# Altium PCB SM_ME0005V2.6_20161210.PcbDoc (part 1 of 2)
Units mm, origin at the board's own origin, x right, y up, seen from the top; angles counter-clockwise.
Board outline 58.04 x 88.14 mm, 2 copper layers (Top Layer, Bottom Layer); 87 components, 70 nets, 269 pads, 297 vias.
Unrouted connection lines stored in the file: 30.
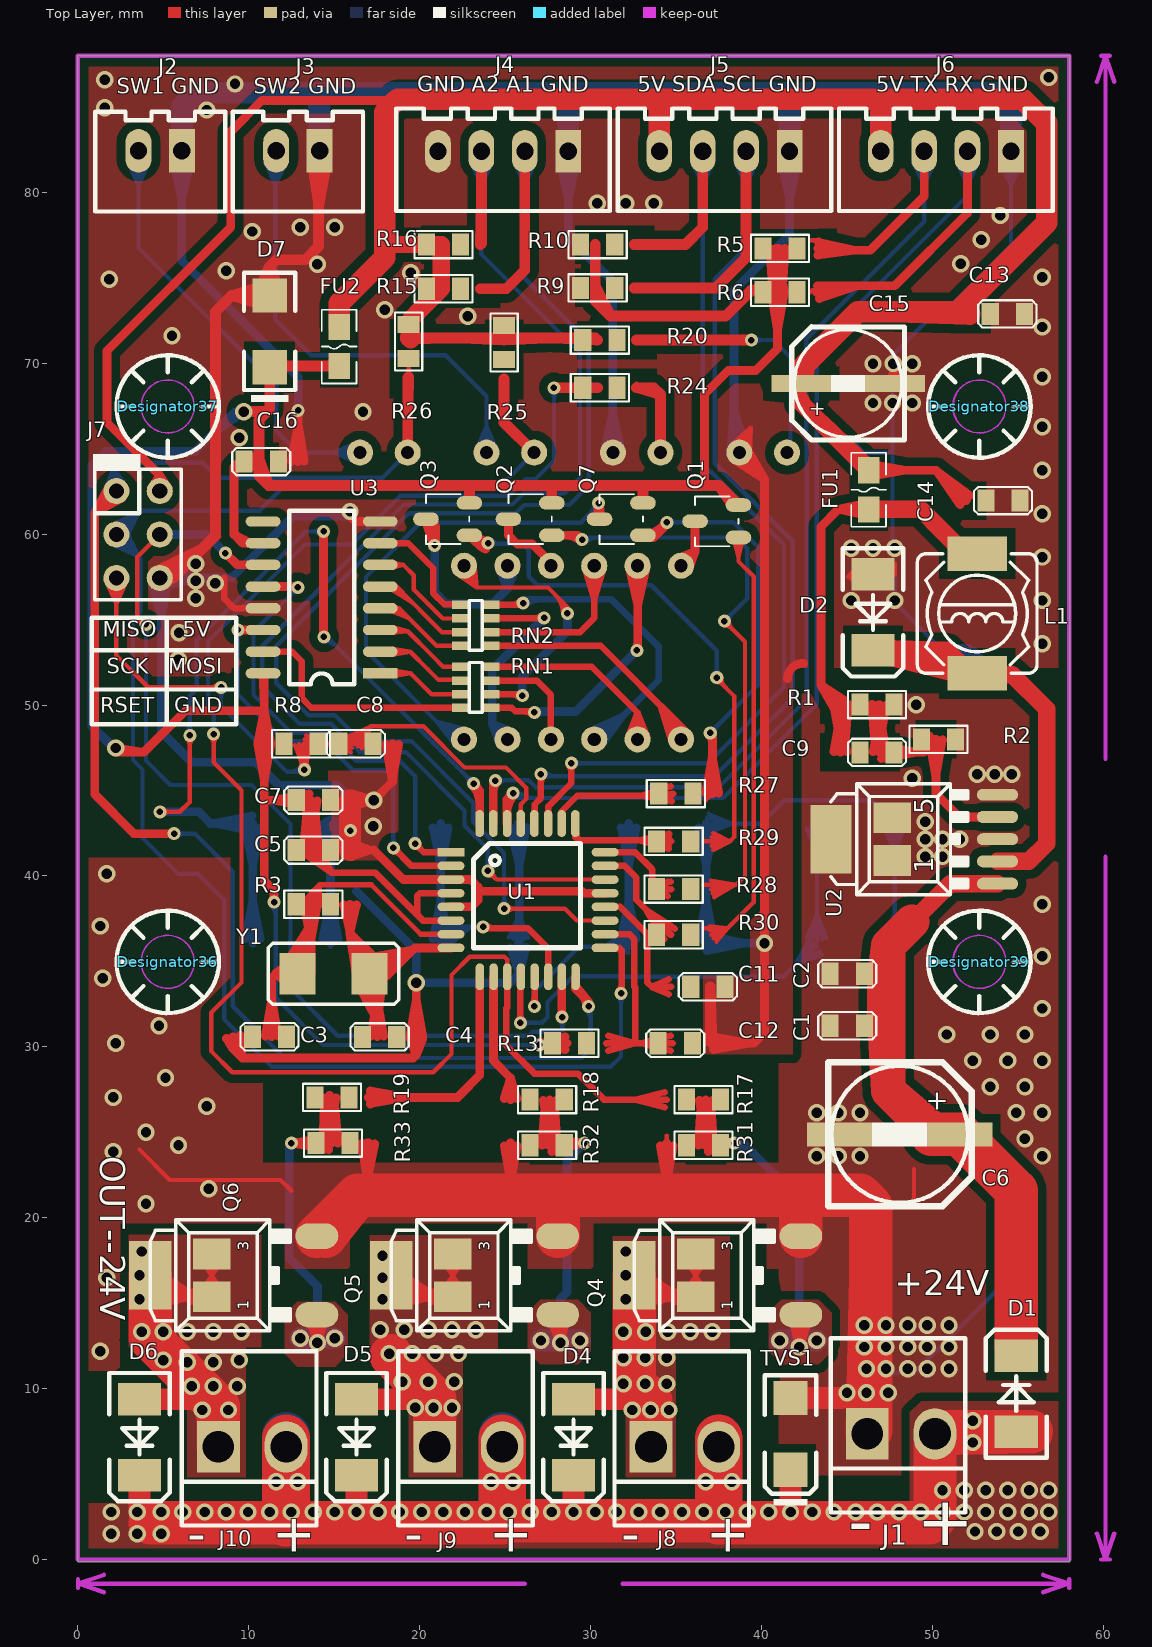
[diagram p0: Top Layer view]
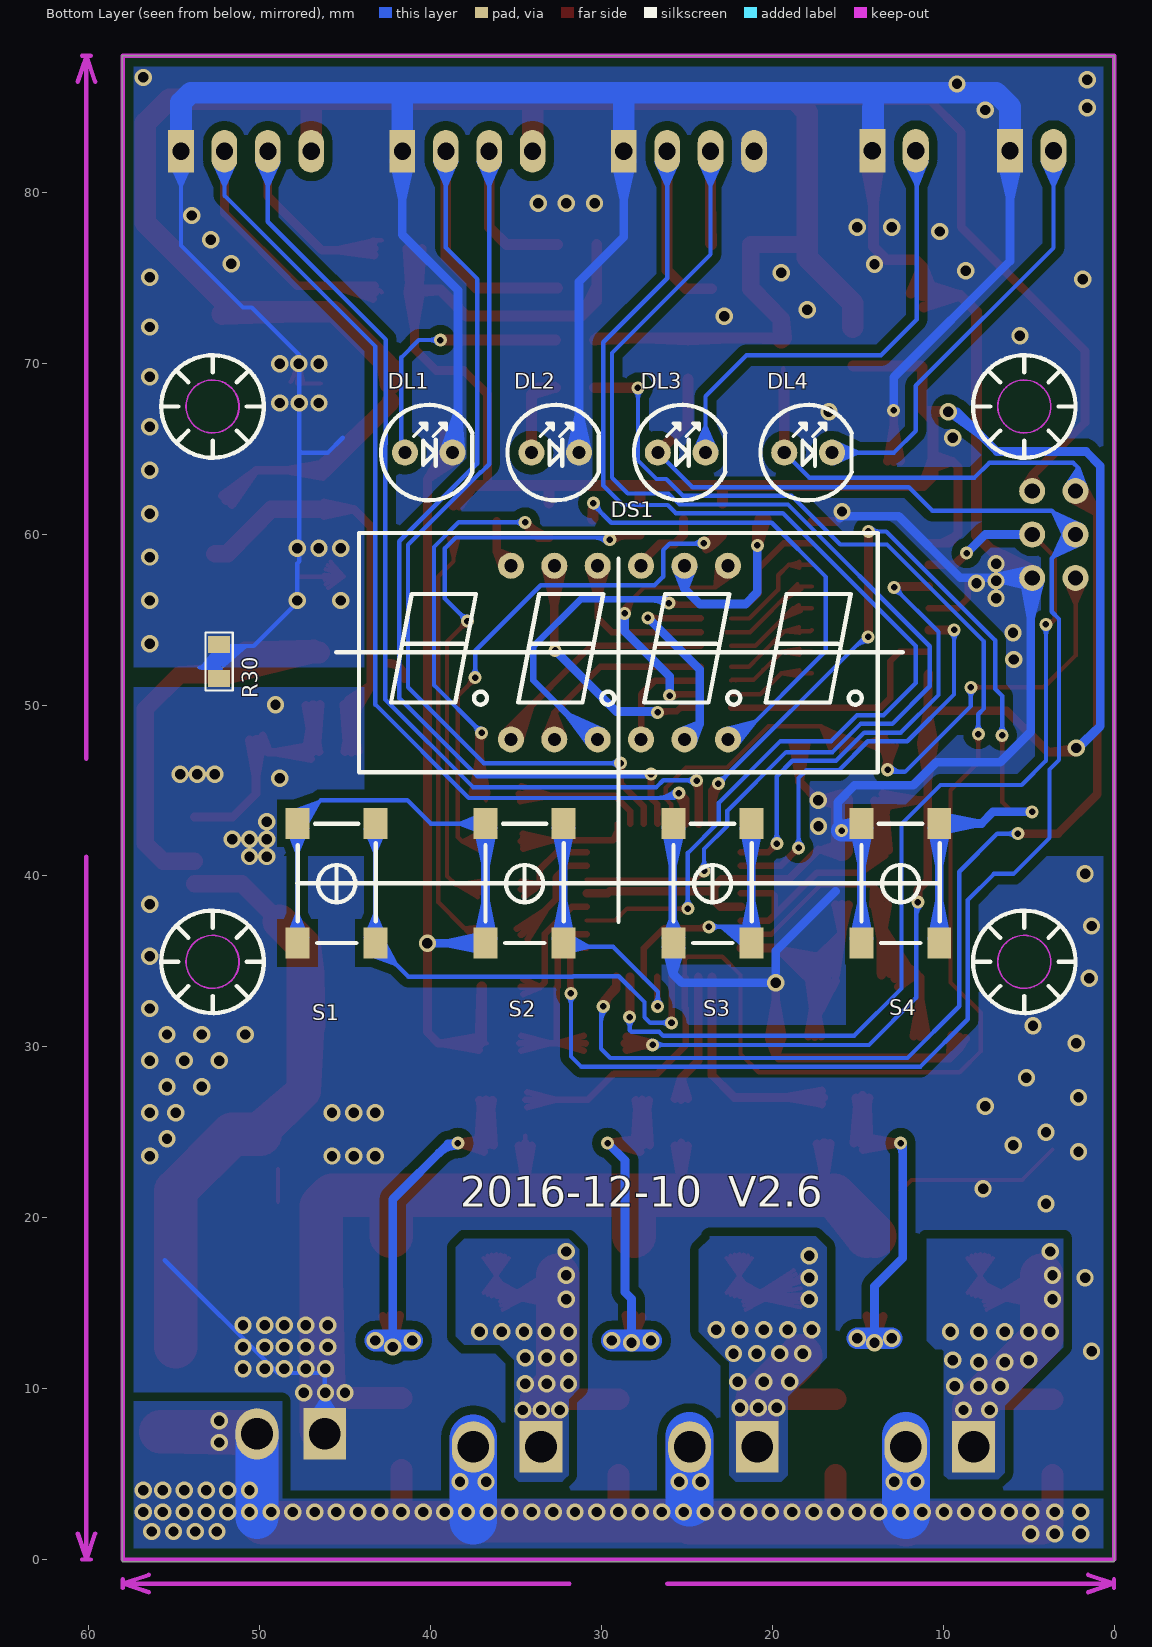
[diagram p1: Bottom Layer view, seen from below]

## Layer stack, top to bottom
Top Layer: signal copper 0.0356
Dielectric: core 0.32, FR-4, Dk 4.8
Bottom Layer: signal copper 0.0356

## Board outline
-0.013,88 -0.013,-0.138 58.026,-0.138 58.026,88

## Design rules (kind name [scope] priority, off if disabled: settings)
AssemblyTestPointUsage [All] p1 off:
AssemblyTestpoint [All] p1 off: testpointundercomponent=TRUE minsize=1.016 maxsize=2.54 preferedsize=1.524 minholesize=0 maxholesize=1.016 preferedholesize=0.813 testpointgrid=0.025 usegrid=TRUE gridtolerance=0 allowsidetop=TRUE allowsidebottom=TRUE
Clearance [All] p1: gap=0.254
ComponentClearance [All] p1 off: gap=0.254 collisioncheckmode=3 verticalgap=0.254 showdistances=FALSE
FabricationTestPointUsage TestPointUsage [All] p1 off: valid=0 allowmultiple=FALSE
FabricationTestpoint Testpoint [All] p1 off: side=3 testpointundercomponent=TRUE minsize=1.016 maxsize=2.54 preferedsize=1.524 minholesize=0 maxholesize=1.016 preferedholesize=0.813 testpointgrid=0.025 allowsidetop=TRUE allowsidebottom=TRUE usegrid=TRUE gridtolerance=0
Height [All] p1 off: minheight=0 maxheight=25.4 prefheight=12.7
HoleSize [All] p1 off: absolutevalues=TRUE maxlimit=2.54 minlimit=0.025 maxpercent=80.000 minpercent=20.000
HoleToHoleClearance [All] p1 off: gap=0.254 allowstackedmicrovias=TRUE
LayerPairs [All] p1 off: enforce=TRUE
MinimumSolderMaskSliver [All] p1 off: minsoldermaskwidth=0.254
NetAntennae [All] p1 off: netantennaetolerance=0
PolygonConnect [All] p1: connectstyle=Direct reliefconductorwidth=0.762 reliefentries=4 polygonreliefangle="45 Angle"
RoutingVias [All] p1: holewidth=0.381 width=0.762 viastyle="Through Hole" minholewidth=0.254 minwidth=0.508 maxholewidth=0.762 maxwidth=1.27
SilkToSilkClearance [All] p1 off: silktosilkclearance=0.254
SilkscreenOverComponentPads [IsPad] p1 off: minsilkscreentomaskgap=0.254
SolderMaskExpansion [isvia] p1: expansion=-2.54
Width [All] p1: maxlimit=7.62 minlimit=0.254 preferedwidth=0.508 minimp=50.000000 maximp=50.000000 favimp=50.000000
15 further rules are at their usual default settings.

## Components (designator, comment, footprint, x,y, rotation, side; value= is the part's Value field where it differs from the comment)
C1 "100pF" 0805C 46.018,31.231 r180 top
C2 "100pF" 0805C 46.018,34.279 r180 top
C3 "22pF" 0805C 10.204,30.596 r0 top
C4 "22pF" 0805C 18.656,30.584 r180 top
C5 "0.1uF" 0805C 14.776,41.518 r180 top
C6 "100UF/63V_E" SMD-EC-F8 51.606,24.881 r180 top
C7 "0.1uF" 0805C 14.776,44.439 r180 top
C8 "100nF" 0805C 17.259,47.741 r180 top
C9 "33nF" 0805C 45.764,47.233 r0 top
C11 "100nF" 0805C 35.858,33.517 r0 top
C12 "100nF" 0805C 35.951,30.215 r180 top
C13 "0.1UF" 0805C 53.384,72.887 r0 top
C14 "100pF" 0805C 53.13,61.965 r0 top
C15 "100uF/16V" SMD-EC-F6.3 42.335,68.823 r0 top
C16 "10uF" 0805C 11.728,64.251 r180 top
D1 "1N4004" D7227 54.908,7.482 r90 top
D2 "SS34" D7227 46.526,57.647 r270 top
D4 "1N4004" D7227 29,9.387 r270 top
D5 "1N4004" D7227 16.3,9.387 r270 top
D6 "1N4004" D7227 3.6,9.387 r270 top
D7 "5.6V" LC-SMA(DO-214AC)_S4 11.22,71.871 r90 top
Designator36 "Comment" M3.1 5.25,34.975 r0 top locked
Designator37 "Comment" M3.1 5.25,67.475 r0 top locked
Designator38 "Comment" M3.1 52.75,67.475 r0 top locked
Designator39 "Comment" M3.1 52.75,34.975 r0 top locked
DL1 "红" LED-3 40.1,64.775 r180 bottom
DL2 "绿" LED-3 32.7,64.775 r180 bottom
DL3 "黄" LED-3 25.3,64.775 r180 bottom
DL4 "黄" LED-3 17.9,64.775 r180 bottom
DS1 "SR410561K" SR410361 28.943,53.075 r180 bottom
FU1 "500mA/6V" F0805 46.272,61.457 r90 top
FU2 "100mA/6V" F0805 15.284,72.125 r270 top
J1 "SIP2-2.54" CH3.96-2P 50.152,7.355 r0 top
J2 "SIP2-2.54" SIP-2L 4.813,82.437 r180 top
J3 "SIP2-2.54" SIP-2L 12.871,82.437 r180 top
J4 "A_INPUT" SIP-4L 28.689,82.412 r180 top
J5 "IIC" SIP-4L 41.643,82.412 r180 top
J6 "USRT" SIP-4L 54.597,82.412 r180 top
J7 "ISP下载口" DIP6-2.54 6.083,63.87 r270 top
J8 "OUT-A" CH3.96-2P 37.494,6.593 r0 top
J9 "OUT-B" CH3.96-2P 24.837,6.593 r0 top
J10 "OUT-C" CH3.96-2P 12.179,6.593 r0 top
L1 "100uH/1A" L-CD74 52.622,55.361 r270 top
Q1 "S8550" SOT-23_B 38.652,59.806 r90 top
Q2 "S8550" SOT-23_B 27.73,59.933 r90 top
Q3 "S8550" SOT-23_B 22.904,59.933 r90 top
Q4 "NCE4060K" TO-252-3S 36.055,16.626 r90 top
Q5 "NCE4060K" TO-252-3S 21.831,16.626 r90 top
Q6 "NCE4060K" TO-252-3S 7.734,16.626 r90 top
Q7 "S8550" SOT-23_B 33.064,59.933 r90 top
R1 "10K" 0805R 45.764,50.027 r0 top
R2 "3.3K" 0805R 51.352,47.995 r180 top
R3 "1MR" 0805R 14.776,38.343 r180 top
R5 "2K" 0805R 42.081,76.722 r180 top
R6 "2K" 0805R 42.081,74.157 r180 top
R8 "1K" 0805R 12.052,47.741 r0 top
R9 "2K" 0805R 31.413,74.411 r180 top
R10 "2K" 0805R 31.413,76.951 r180 top
R13 "10R" 0805R 29.762,30.215 r180 top
R15 "10K" 0805R 22.396,74.36 r180 top
R16 "10K" 0805R 22.396,76.951 r180 top
R17 "22R" 0805R 35.604,26.913 r0 top
R18 "22R" 0805R 26.46,26.913 r0 top
R19 "22R" 0805R 15.862,27.04 r180 top
R20 "2K" 0805R 31.54,71.363 r180 top
R24 "2K" 0805R 31.54,68.569 r180 top
R25 "2K" 0805R 24.936,70.22 r90 top
R26 "2K" 0805R 19.348,70.271 r90 top
R27 "1K" 0805R 35.985,44.82 r180 top
R28 "1K" 0805R 35.858,42.026 r180 top
R29 "1K" 0805R 35.858,39.232 r180 top
R30 "0R" 0805R 52.368,51.551 r90 bottom
R30 "1K" 0805R 35.858,36.565 r180 top
R31 "470K" 0805R 35.604,24.246 r0 top
R32 "470k" 0805R 26.46,24.246 r0 top
R33 "470k" 0805R 15.919,24.373 r180 top
RN1 "8P4R 0603" 8P4R_0603 22.396,52.237 r0 top
RN2 "8P4R 0603" 8P4R_0603 22.396,55.869 r0 top
S1 "SW-PB" BUTTON_SMT_6*6 45.5,39.575 r90 bottom
S2 "SW-PB" BUTTON_SMT_6*6 34.5,39.575 r90 bottom
S3 "SW-PB" BUTTON_SMT_6*6 23.5,39.575 r90 bottom
S4 "SW-PB" BUTTON_SMT_6*6 12.5,39.575 r90 bottom
TVS1 "SMBJ30CA" LC-SMA(DO-214AC)_S5 41.7,7.355 r90 top
U1 "ATMEGA328PA" TQFP32 20.815,43.931 r0 top
U2 "XL7015" TO-252-5L 48.812,42.153 r90 top
U3 "SN74HC595D" SO-16N 18.783,51.17 r180 top
Y1 "16MHz" SMT5032 14.954,34.279 r180 top

## Footprints (in the part's own frame and the unit in brackets; to place one, negate y for a bottom-side part, rotate by r counter-clockwise, add the part's x,y. Pads: shape width x height; smd on the part's side, far side on the other; paste and mask are expansions set on the pad)
8P4R_0603 [mm]
  rect 1.016x0.5 smd: 1(0,0) 2(1.778,0) 3(0,-0.8) 4(1.778,-0.8) 5(0,-1.6) 6(1.778,-1.6) 7(0,-2.4) 8(1.778,-2.4)
  silkscreen extent 0.51,-2.67 1.27,0.25
0805C [mm]
  rect 1x1.3 smd: 1(0,0) 2(2,0)
  silkscreen extent -0.7,-0.8 2.7,0.8
0805R [mm]
  rect 1x1.3 smd: 1(0,0) 2(2,0)
  silkscreen extent -0.7,-0.8 2.7,0.8
BUTTON_SMT_6*6 [mm]
  rect 1.8x1.4 smd paste+0: 1(-3.5,2.275) 1(3.5,2.275) 2(-3.5,-2.275) 2(3.5,-2.275)
  silkscreen extent -3.5,-2.3 3.48,2.28
CH3.96-2P [mm]
  rect 2.5x3 hole 1.85: 1(-3.96,0)
  oval 2.5x3 hole 1.85: 2(0,0)
  silkscreen extent -6.1,-4.6 1.78,5.59, body extent -5.94,-3.91 1.92,4.59, height 10.9
D7227 [mm]
  rect 1.905x2.54 smd: A(0,0) K(4.445,0)
  silkscreen extent -1.52,-1.78 5.97,1.78, body extent -0.56,-1.45 4.93,1.35, height 2.24
DIP6-2.54 [mil]
  round 60 hole 35: 1(53,-151) 2(53,-51) 3(153,-151) 4(153,-51) 5(253,-151) 6(253,-51)
  silkscreen extent -33,-205 303,-1, body extent 3,-200 303,0, height 398
F0805 [mil]
  rect 60x50 smd: 1(0,0) 2(90,0)
  silkscreen extent -40,-40 130,40, body extent 4,-23 82,24, height 20
L-CD74 [mm]
  rect 2x3.5 smd mask+0.1: 1(3.5,0) 2(-3.5,0)
  silkscreen extent -3.5,-3.5 3.5,3.5
LC-SMA(DO-214AC)_S4 [mm]
  rect 2x2 smd: 1(2.1,0) 2(-2.1,0)
  silkscreen extent -4.12,-1.5 3.43,1.5
LC-SMA(DO-214AC)_S5 [mm]
  rect 2x2 smd: 1(2.1,0) 2(-2.1,0)
  silkscreen extent -4.2,-1.5 3.43,1.5
LED-3 [mil]
  round 60 hole 30: A(-55,0) K(55,0)
  silkscreen extent -110,-110 101,110
M3.1 [mm]
  Keep-Out Layer circle w0.1: c0,0 r1.55
  silkscreen extent -3,-3 3,3
SIP-2L [mil]
  rect 60x100 hole 40: 1(-50,0)
  oval 60x100 hole 40: 2(50,0)
  silkscreen extent -150,-90 150,140
SIP-4L [mm]
  rect 1.5x2.5 hole 1: 1(0,0)
  oval 1.5x2.5 hole 1: 2(2.54,0) 3(5.08,0) 4(7.62,0)
  silkscreen extent -2.44,-2.5 10.06,3.5, body extent -2.47,-2.52 9.93,3.58, height 7
SMD-EC-F6.3 [mm]
  rect 3.5x1 smd: 1(0,0) 2(5.475,0)
  silkscreen extent -0.56,-3.31 6.04,3.31
SMD-EC-F8 [mm]
  rect 3.8x1.4 smd: 1(0,0) 2(7.051,0)
  silkscreen extent -0.69,-4.22 7.71,4.2
SMT5032 [mm]
  rect 2.1x2.4 smd: 1(-2.1,0) 2(2.1,0)
  silkscreen extent -3.81,-1.78 3.81,1.78
SO-16N [mil]
  rect 80x24 smd: 1(43,-27)
  oval 80x24 smd: 2(43,-77) 3(43,-127) 4(43,-177) 5(43,-227) 6(43,-277) 7(43,-327) 8(43,-377) 9(313,-377) 10(313,-327) 11(313,-277) 12(313,-227) 13(313,-177) 14(313,-127) 15(313,-77) 16(313,-27)
  silkscreen extent 103,-402 253,-2, body extent 62,-403 300,3, height 84
SOT-23_B [mm]
  oval 0.8x1.5 smd: 1(0,0) 2(1.9,0) 3(0.95,2.54)
  silkscreen extent -0.51,0 2.4,2.54, body extent -0.48,-0.13 2.42,2.67, height 1.2
SR410361 [mil]
  round 60 hole 30: a(-150,200) b(250,200) c(50,-200) com1(-250,200) com2(50,200) com3(150,200) com4(250,-200) d(-150,-200) dp(-50,-200) e(-250,-200) f(-50,200) g(150,-200)
  silkscreen extent -600,-276 595,276, body extent -591,-275 591,276, height 287
TO-252-3S [mm]
  oval 1.5x2.5 smd: 1(-2.3,-6.25) 3(2.3,-6.25)
  rect 1.8x2.2 smd: 2(-1.25,-0.1) 2(1.25,-0.1)
  rect 4x2.5 smd: 2(0,3.5)
  silkscreen extent -3.25,-4.7 3.25,3.5
TO-252-5L [mm]
  oval 0.7x2.413 smd: 1(-2.6,-5) 2(-1.3,-5) 3(0,-5) 4(1.3,-5) 5(2.6,-5)
  rect 1.8x2.2 smd: 3(-1.25,1.15) 3(1.25,1.15)
  rect 4x2.413 smd: 3(0,4.75)
  silkscreen extent -3.25,-3.25 3.25,4.75
TQFP32 [mil]
  rect 62x19.68 smd: 1(40,-100)
  oval 62x19.68 smd: 2(40,-131.5) 3(40,-162.99) 4(40,-194.49) 5(40,-225.98) 6(40,-257.48) 7(40,-288.98) 8(40,-320.47) 17(395,-320.47) 18(395,-288.98) 19(395,-257.48) 20(395,-225.98) 21(395,-194.49) 22(395,-162.99) 23(395,-131.5) 24(395,-100)
  oval 19.68x62 smd: 9(106.51,-387) 10(138.01,-387) 11(169.5,-387) 12(201,-387) 13(232.5,-387) 14(263.99,-387) 15(295.49,-387) 16(326.98,-387) 25(326.52,-33.95) 26(295.02,-33.95) 27(263.53,-33.95) 28(232.03,-33.95) 29(200.54,-33.95) 30(169.04,-33.95) 31(137.54,-33.95) 32(106.05,-33.95)
  silkscreen extent 92,-320 338,-80, body extent 39,-388 393,-34, height 63

## Part data
C3 C4 C5 C7 C8 C11 C12 C16: library part CAP, "Capa"
C6 C15: library part 22UF/35V_E
D1 D4 D5 D6: library part Diode_2, "Default Diode"
D2: library part DIODE, "DIODE"
D7 TVS1: library part DIODE2, "DIODE2"
FU1 FU2: library part FUSE2, "Fuse"
J1 J2 J3: "CN"
J4 J5 J6: library part SIP4-2.54, "CN"
J8 J9 J10: library part CON2, "Connector"
L1: library part INDUCTOR
Q1 Q2 Q3 Q7: library part PNP, "PNP Transistor"
Q4 Q5 Q6: "NMOSFET"
R3 R5 R6 R8 R9 R10 R13: library part Res3, "Res"
U3: "8-Bit Shift Register with"
Y1: library part XTAL, "Crystal Oscil"

## Via types
v1: diameter 1.016, hole 0.61, Top Layer to Bottom Layer, 247 vias
v2: diameter 0.762, hole 0.381, Top Layer to Bottom Layer, 50 vias

## Nets (pads, with @x,y where several pads share a name; then routed paths per layer and width w, separated by ;. In a path a pad name is that pad's centre, name@x,y a point inside that pad or via, vN(x,y) a via of type N, cw(c..) or ccw(c..) an arc to the next point about the centre after c; other vN are vias at no path point)
+5V: C13.1 C14.1 C15.1 FU1.2 FU2.1 J5.4 J6.4 J7.2 R15.2 R16.2 R20.2 R25.2 R26.2 | length 222.6
  Top Layer w0.254: 19.348,71.49 19.475,71.363 ; 34.023,85.263 46.158,85.263 46.977,84.444
  Top Layer w0.508: 18.637,85.384 10.763,85.384 8.934,83.555 8.934,77.967 1.695,70.728 1.695,66.537 4.788,63.444 ; 42.335,69.331 C15.1@42.335,68.823 ; 43.097,67.045 42.335,67.807 ; FU1.2@46.272,63.743 50.209,63.743 51.987,61.965 ; FU1.2@46.306,63.363 48.431,63.743 FU1.2@46.306,64.122 ; 51.629,61.724 50.274,63.678 ; 51.923,61.965 50.274,63.678 ; 52.176,62.25 50.274,63.678 ; 4.788,63.444 J7.2@4.788,62.524 4.788,63.444 ; 4.788,63.444 4.299,62.664 4.788,63.444 ; 4.788,63.444 5.276,62.664 4.788,63.444 ; 42.335,67.807 C15.1@42.335,68.823 ; 42.335,67.807 C15.1@42.335,68.823
  Top Layer w0.635: 19.348,71.414 21.893,71.49 ; 19.348,71.49 19.475,71.49 30.27,71.49 30.397,71.363 ; 22.386,71.49 24.936,71.363 27.486,71.49 ; 27.781,71.49 30.333,71.363
  Top Layer w1.016: 19.475,71.363 19.475,71.49 R26.2@19.475,72.582 ; 21.189,74.36 R26.2@19.475,72.582 ; 21.189,76.951 17.951,76.951 21.253,76.951 ; 42.335,67.807 42.335,67.68 FU1.2@46.272,63.743 ; 43.482,66.533 FU1.2@46.272,63.87 ; R26.2@19.475,72.582 21.253,74.36 ; R26.2@19.475,72.582 19.348,71.477 R26.2@19.475,72.582 ; 21.253,74.36 21.253,76.951 ; 21.253,74.36 21.253,76.951
  Top Layer w1.27: FU2.1@15.284,72.125 15.284,73.522 ; J5.4@34.023,82.412 34.023,85.079 J5.4@34.023,82.912 ; C15.1@42.335,68.823 42.525,69.902 45.637,73.014 51.479,73.014 ; 42.335,69.331 42.335,69.712 ; J6.4@46.977,82.412 46.977,84.444 ; J6.4@46.977,82.912 46.977,84.444 ; 47.723,73.014 52.177,72.887 ; 15.284,73.522 17.951,76.189 17.951,76.951 17.951,84.698 18.637,85.384 18.713,85.46 21.907,85.46 47.288,85.46 ; 15.284,73.522 15.284,72.252 15.284,73.522 ; 46.977,84.444 46.977,85.149 47.288,85.46 ; 47.288,85.46 55.289,85.46 56.686,84.063 56.686,78.221 51.479,73.014 ; 51.479,73.014 52.177,72.887 ; 51.479,73.014 52.177,72.887
+24V: D1.A D4.K D5.K D6.K J1.2 J8.2 J9.2 J10.2 TVS1.2 | length 348.4
  Top Layer w0.254: D4.K@28.689,4.942 D4.K@29,4.942 D4.K@29.127,4.815 ; D1.A@54.343,7.355 54.908,6.79 54.562,7.136 D1.A@54.343,7.355
  Top Layer w0.508: 29,2.275 v1(29,2.783)
  Top Layer w0.635: 12.179,1.71 12.179,2.148 ; D4.K@29,4.942 D4.K@29.127,4.815 ; 37.367,2.275 37.494,2.148 37.494,1.782
  Top Layer w1.27: D6.K@3.6,4.942 v1@3.6,2.783 ; v1(16.3,2.783) D5.K@16.3,4.942 ; v1(29,2.783) D4.K@29,4.942 ; v1@3.6,2.783 4.235,2.148 v1@3.6,2.783 ; v1@41.7,2.529 41.954,2.275 ; v1@41.7,2.529 TVS1.2@41.7,5.255 v1@41.7,2.529 ; 41.954,2.275 41.827,2.148 41.954,2.275
  Top Layer w2.54: 18.84,2.148 12.179,2.148 ; v1@24.837,2.529 25.091,2.275 ; 12.179,2.148 23.031,2.148 ; 12.179,2.148 4.235,2.148 5.251,2.148 6.775,2.148 8.299,2.148 9.95,2.148 11.728,2.148 12.179,2.148 ; 12.179,2.148 13.379,2.148 15.157,2.148 16.808,2.148 18.459,2.148 20.11,2.148 21.634,2.148 23.031,2.148 ; 23.031,2.148 24.837,2.148 24.428,2.148 23.031,2.148 ; 25.091,2.275 37.367,2.275 36.62,2.275 35.223,2.275 33.699,2.275 32.302,2.275 30.778,2.275 29.254,2.275 29,2.275 27.476,2.275 25.952,2.275 25.091,2.275 ; 41.827,2.148 49.828,2.148 ; 41.827,2.148 37.494,2.148 38.017,2.148 39.541,2.148 40.938,2.148 41.827,2.148 ; 41.827,2.148 42.462,2.148 44.113,2.148 45.51,2.148 47.034,2.148 48.431,2.148 49.32,2.148 49.828,2.148 ; 49.828,2.148 50.152,2.472 ; 50.152,2.472 J1.2@50.152,7.355 ; 50.152,2.472 50.152,3.418 50.152,3.545 ; 50.152,2.472 J1.2@50.152,7.105 ; 50.152,3.545 50.152,5.069 ; 50.152,3.545 J1.2@50.152,7.105 ; 50.152,5.069 50.152,5.577 ; 50.152,5.069 J1.2@50.152,7.105 ; 50.152,5.069 J1.2@50.152,7.105 ; 50.152,5.577 J1.2@50.152,7.355 ; 50.152,5.577 J1.2@50.152,7.105 ; 50.152,5.577 J1.2@50.152,7.105 ; J1.2@50.152,7.355 J1.2@50.279,7.482 ; J1.2@50.152,7.355 52.368,7.482 ; J1.2@50.152,7.355 52.241,7.482 ; J1.2@50.152,7.355 52.241,7.482 ; J1.2@50.152,7.355 55.797,7.482 J1.2@50.279,7.482 ; J1.2@50.152,7.355 D1.A@54.908,7.482 52.368,7.482 ; J1.2@50.152,7.355 52.368,7.482 ; J1.2@50.152,7.355 D1.A@54.59,7.482 ; J1.2@50.152,7.355 52.368,7.482 ; J1.2@50.152,7.355 D1.A@54.59,7.482 ; J1.2@50.152,7.355 52.241,7.482 ; J1.2@50.152,7.355 D1.A@54.59,7.482 ; J1.2@50.152,7.355 D1.A@54.59,7.482 ; J1.2@50.152,7.355 52.368,7.482 ; J1.2@50.279,7.482 52.241,7.482 ; J1.2@50.279,7.482 D1.A@54.59,7.482 ; 52.241,7.482 52.368,7.482 ; 52.241,7.482 D1.A@54.59,7.482 ; 52.368,7.482 D1.A@54.59,7.482 ; 52.368,7.482 D1.A@54.59,7.482
  Top Layer w2.794: J10.2@12.179,6.593 12.179,4.561 ; J10.2@12.179,7.101 12.179,2.148 ; J9.2@24.837,7.101 J9.2@24.837,6.593 ; J8.2@37.494,6.593 37.494,4.561 ; J8.2@37.494,7.101 v1@37.494,2.783 ; 12.179,2.148 12.179,4.561 ; 12.179,2.148 J10.2@12.179,6.343 ; 12.179,2.148 J10.2@12.179,6.343 ; 12.179,4.561 J10.2@12.179,6.343 ; 12.179,4.561 J10.2@12.179,6.343 ; v1@24.837,2.529 J9.2@24.837,6.593 ; v1@24.837,2.529 24.837,4.561 ; v1@24.837,2.529 J9.2@24.837,6.343 ; v1@24.837,2.529 J9.2@24.837,6.343 ; 24.837,4.561 J9.2@24.837,6.593 ; 24.837,4.561 J9.2@24.837,6.343 ; 24.837,4.561 J9.2@24.837,6.343 ; v1@37.494,2.783 37.494,4.561 ; v1@37.494,2.783 J8.2@37.494,6.343 ; v1@37.494,2.783 J8.2@37.494,6.343 ; 37.494,4.561 J8.2@37.494,6.343 ; 37.494,4.561 J8.2@37.494,6.343
  Bottom Layer w2.54: 50.152,2.459 J1.2@50.152,7.355 50.152,5.577 ; 50.152,2.459 50.152,3.418 50.152,3.545 ; 50.152,2.459 J1.2@50.152,7.105 ; 50.152,3.545 50.152,5.069 ; 50.152,3.545 J1.2@50.152,7.105 ; 50.152,5.069 50.152,5.577 ; 50.152,5.069 J1.2@50.152,7.105 ; 50.152,5.069 J1.2@50.152,7.105 ; 50.152,5.577 J1.2@50.152,7.105 ; 50.152,5.577 J1.2@50.152,7.105
  Bottom Layer w2.794: J10.2@12.179,6.593 12.179,4.561 ; J10.2@12.179,7.228 v1@12.179,2.586 ; J9.2@24.837,6.593 24.837,4.561 ; J9.2@24.837,7.228 24.837,3.319 ; J8.2@37.494,6.593 37.494,4.561 ; J8.2@37.494,7.101 37.494,2.275 ; v1@12.179,2.586 12.179,4.561 ; v1@12.179,2.586 J10.2@12.179,6.343 ; v1@12.179,2.586 J10.2@12.179,6.343 ; 12.179,4.561 J10.2@12.179,6.343 ; 12.179,4.561 J10.2@12.179,6.343 ; 24.837,3.319 24.837,4.561 ; 24.837,3.319 J9.2@24.837,6.343 ; 24.837,3.319 J9.2@24.837,6.343 ; 24.837,4.561 J9.2@24.837,6.343 ; 24.837,4.561 J9.2@24.837,6.343 ; 37.494,2.275 37.494,4.561 ; 37.494,2.275 J8.2@37.494,6.343 ; 37.494,2.275 J8.2@37.494,6.343 ; 37.494,4.561 J8.2@37.494,6.343 ; 37.494,4.561 J8.2@37.494,6.343
  other v1: 1.949,1.513 3.473,1.513 4.87,1.513 52.495,1.64 53.765,1.64 55.035,1.64 56.305,1.64 1.949,2.783 3.473,2.783 4.87,2.783 6.14,2.783 7.41,2.783 8.68,2.783 9.95,2.783 11.22,2.783 12.49,2.783 13.76,2.783 15.03,2.783 17.57,2.783 18.84,2.783 20.11,2.783 21.38,2.783 22.65,2.783 23.92,2.783 25.19,2.783 26.46,2.783 27.73,2.783 30.27,2.783 31.54,2.783 32.81,2.783 34.08,2.783 35.35,2.783 36.62,2.783 37.89,2.783 39.16,2.783 40.43,2.783 41.7,2.783 42.97,2.783 44.24,2.783 45.51,2.783 46.78,2.783 48.05,2.783 49.32,2.783 50.59,2.783 51.86,2.783 53.13,2.783 54.4,2.783 55.67,2.783 56.813,2.783 50.59,4.053 51.86,4.053 53.13,4.053 54.4,4.053 55.67,4.053 56.813,4.053 11.601,4.561 12.871,4.561 24.174,4.561 25.444,4.561 36.747,4.561 38.271,4.561 52.368,6.847 52.368,8.117
A1: J4.2 R15.1 U1.19 | length 95.2
  Top Layer w0.254: v2(24.936,38.089) 28.492,38.089 29.19,37.391 U1.19@30.848,37.391 ; v2@25.116,37.909 cw(c25.549,37.476) 25.549,38.089 cw(c25.549,38.702) v2@25.116,38.269 ; 29.299,37.391 U1.19@30.311,37.391
  Top Layer w0.635: 23.539,74.36 25.063,74.36 ; 23.602,74.36 25.063,74.36 ; J4.2@26.149,82.412 26.149,75.446 25.063,74.36
  Bottom Layer w0.254: v2@24.756,38.269 ccw(c24.323,38.702) 24.936,38.702 ccw(c25.549,38.702) v2@25.116,38.269 ; v2(24.936,38.089) 24.936,41.137 ; 24.936,41.34 24.936,41.137 ; J4.2@25.539,81.784 26.149,80.4 ; J4.2@25.783,81.867 26.149,80.4 ; J4.2@26.149,81.912 26.149,80.4 ; J4.2@26.149,82.412 26.149,74.976 29.889,71.236 29.889,62.854 28.746,61.711 26.119,61.711 25.642,61.234 19.379,61.234 17.824,59.679 11.601,53.456 11.601,51.297 13.491,49.407 15.037,49.407 16.551,47.893 19.515,47.893 23.133,44.276 23.133,43.156 24.936,41.352 24.936,41.137 ; J4.2@26.515,81.867 26.149,80.4 ; J4.2@26.759,81.784 26.149,80.4
A2: J4.3 R16.1 U1.22 | length 91.1
  Top Layer w0.254: v2@23.99,40.045 cw(c23.99,39.432) 24.424,39.865 cw(c24.857,40.299) v2@24.244,40.299 ; v2(23.99,40.299) 24.498,39.791 U1.22@30.848,39.791 ; 29.299,39.791 U1.22@30.311,39.791
  Top Layer w0.635: 23.609,79.494 23.539,76.951 23.609,77.021 J4.3@23.609,82.412
  Bottom Layer w0.254: J4.3@22.999,81.784 23.609,80.4 ; J4.3@23.243,81.867 23.609,80.4 ; J4.3@23.609,81.912 23.609,80.4 ; J4.3@23.609,82.412 23.609,76.373 29.381,70.601 29.381,63.302 28.458,62.38 26.069,62.38 25.431,61.742 19.081,61.742 10.782,53.443 10.782,51.1 12.983,48.899 14.827,48.899 16.476,47.25 19.189,47.25 22.625,43.814 22.625,42.94 23.99,41.575 v2(23.99,40.299) ; v2@23.81,40.478 ccw(c23.377,40.912) 23.99,40.912 ccw(c24.603,40.912) v2@24.17,40.478 ; J4.3@23.975,81.867 23.609,80.4 ; J4.3@24.219,81.784 23.609,80.4
CTR_OUT1: R17.1 R24.2 U1.11 | length 108.6
  Top Layer w0.254: v2@7.764,48.12 cw(c7.33,47.687) 7.943,47.687 cw(c8.557,47.687) v2@8.123,48.12 ; v2(7.943,48.3) 7.943,46.649 9.569,45.023 9.569,33.771 7.918,32.12 7.791,31.993 7.791,29.752 9.029,28.513 20.79,28.513 21.856,29.58 21.856,34.203 22.923,35.27 24.961,35.27 25.12,35.111 ; U1.11@25.12,34.101 25.12,35.111 ; U1.11@25.12,34.639 25.12,35.111
  Top Layer w0.381: U1.11@25.069,34.05 U1.11@25.12,34.101 25.12,32.298 ; U1.11@25.12,33.564 25.12,32.298 ; 34.342,26.472 32.619,26.913 ; 34.342,27.354 32.619,26.913 ; 34.397,26.913 32.619,26.913 ; 34.461,26.913 30.778,26.913 29.254,28.437 26.714,28.437 25.069,30.081 25.069,32.247 25.12,32.298
  Top Layer w0.635: 30.333,68.569 v2(27.857,68.569) 30.397,68.569
  Bottom Layer w0.254: v2@7.764,48.479 ccw(c7.33,48.913) 7.943,48.913 ccw(c8.557,48.913) v2@8.123,48.479 ; v2(7.943,48.3) 7.943,49.468 7.613,49.798 7.613,53.727 13.286,59.4 16.021,59.4 18.871,62.25 25.221,62.25 26.206,63.235 26.773,63.235 27.857,64.318 v2(27.857,68.569) ; v2@27.677,68.389 cw(c27.244,67.956) 27.857,67.956 cw(c28.47,67.956) v2@28.037,68.389
CTR_OUT2: R18.1 U1.10 | length 11.9
  Top Layer w0.508: 24.32,31.79 U1.10@24.32,33.564 ; U1.10@24.32,34.101 24.32,29.18 25.317,28.183 ; 24.94,26.97 25.317,28.183 ; 25.317,26.913 25.317,28.183 ; 25.694,26.97 25.317,28.183
CTR_OUT3: R19.1 U1.9 | length 21.2
  Top Layer w0.254: 22.212,27.167 22.339,27.167
  Top Layer w0.508: 17.005,27.04 22.212,27.04 22.339,27.167 23.52,28.348 U1.9@23.52,34.101 ; 17.068,27.04 19.227,27.04 ; 17.102,26.66 19.227,27.04 ; 17.102,27.419 19.227,27.04 ; 23.52,31.79 U1.9@23.52,33.564
DIS_COM1: Q1.1 R30.1@35.858,36.565 | length 40.4
  Top Layer w0.254: Q1.1@38.381,59.774 38.652,58.644 ; Q1.1@38.923,59.774 38.652,58.644 ; 38.017,36.946 36.62,36.946 37.001,36.946 38.017,36.946 ; 38.017,36.946 39.541,38.47 39.541,57.52 38.652,58.409 Q1.1@38.652,59.806 38.652,58.644 ; 38.017,36.946 36.998,37.069 38.017,36.946 ; 38.017,36.946 37.364,36.155 38.017,36.946 ; 38.017,36.946 37,36.811 38.017,36.946 ; 38.017,36.946 37.187,36.343 38.017,36.946 ; 38.017,36.946 37.064,36.565 38.017,36.946
DIS_COM2: Q2.1 R29.1 | length 56.7
  Top Layer w0.254: 37.242,38.756 38.475,39.486 ; 37.242,38.756 38.47,39.486 ; v2@37.833,54.656 cw(c37.833,54.043) 38.267,54.476 cw(c38.7,54.91) v2@38.087,54.91 ; v2(37.833,54.91) 39.033,53.71 39.033,39.994 38.525,39.486 ; 38.47,39.486 37.064,39.74 38.475,39.486 ; 38.47,39.486 37.042,39.485 38.475,39.486 ; 38.47,39.486 37.132,38.987 38.475,39.486 ; 38.47,39.486 37.064,39.232 38.475,39.486 ; 38.525,39.486 36.62,39.486 37.001,39.486 38.525,39.486
  Top Layer w0.508: Q2.1@27.73,59.933 v2@29.254,59.933 ; Q2.1@28.08,59.933 v2@29.254,59.933 ; v2(29.508,59.679) v2@29.254,59.933 ; 28.588,59.933 cw(c28.588,58.759) 29.418,59.589 ccw(c28.588,58.759) 28.588,59.933
  Bottom Layer w0.254: v2(29.508,59.679) 29.635,59.806 38.525,59.806 39.16,59.171 39.16,56.237 v2(37.833,54.91) ; v2@29.688,59.499 cw(c30.428,58.759) 30.428,59.806 ; v2@37.833,55.164 ccw(c37.833,55.777) 38.267,55.344 ccw(c38.7,54.91) v2@38.087,54.91
DIS_COM3: Q3.1 R28.1 | length 46.6
  Top Layer w0.254: v2@23.742,59.476 v2(23.996,59.476) ; 36.62,42.026 37.001,42.026 38.144,42.026 ; 37.064,42.026 38.144,42.026 ; 37.094,41.774 38.144,42.026 ; 37.094,42.278 38.144,42.026 ; 37.184,41.532 38.144,42.026 ; 37.184,42.52 38.144,42.026 ; v2@37.357,51.576 v2(37.382,51.602) ; v2@37.382,51.348 cw(c37.382,50.857) 37.729,51.204 ; v2@37.509,51.424 38.398,50.535 38.398,42.28 38.144,42.026 ; v2@37.636,51.602 ccw(c38.372,51.602) 37.852,51.081
  Top Layer w0.508: Q3.1@23.348,59.845 ccw(c23.963,60.502) v2@23.992,59.603 ; v2@23.973,59.601 cw(c23.755,60.783) Q3.1@22.904,59.933 23.361,59.476 ; Q3.1@23.254,59.933 23.742,59.476 23.361,59.476 ; Q3.1@23.254,59.933 23.361,59.476 ; Q3.1@23.254,59.933 23.361,59.476 ; Q3.1@23.264,59.892 ccw(c24.423,60.164) 23.795,59.152 cw(c24.423,60.164) Q3.1@23.264,59.892 ; Q3.1@23.293,59.766 ccw(c24.182,59.974) 23.863,59.119 cw(c24.182,59.974) Q3.1@23.293,59.766
  Bottom Layer w0.254: v2(23.996,59.476) 24.022,59.45 26.003,59.45 26.384,59.069 26.384,57.52 26.892,57.012 33.547,57.012 37.382,53.177 v2(37.382,51.602) ; v2@24.176,59.296 cw(c24.548,58.924) 24.548,59.45 ; v2@24.176,59.655 ccw(c24.671,60.15) 24.671,59.45 ; v2@37.202,51.781 ccw(c36.769,52.215) 37.382,52.215 ccw(c37.995,52.215) v2@37.562,51.781
DIS_COM4: Q7.1 R27.1 | length 33.8
  Top Layer w0.254: 36.747,44.439 37.128,44.82 37.255,44.947
  Top Layer w0.508: Q7.1@33.414,59.933 v2@34.461,60.568 ; 34.031,60.307 ccw(c33.68,60.886) v2@34.338,60.725 ; 34.154,60.261 ccw(c33.721,60.695) v2@34.334,60.695 ; v2(34.461,60.695) v2@34.461,60.568 ; 36.748,44.854 37.128,46.979 37.508,44.854 ; v2@36.911,48.286 cw(c36.388,47.763) 37.128,47.763 ; v2(37.001,48.376) 37.128,48.249 37.128,44.82 ; Q7.1@33.699,59.806 33.064,59.806 Q7.1@33.699,59.806 ; Q7.1@33.699,59.806 v2@34.461,60.568
  Bottom Layer w0.254: v2(34.461,60.695) 38.354,60.695 39.795,59.254 39.795,51.17 v2(37.001,48.376) ; v2@34.641,60.515 cw(c35.074,60.082) 35.074,60.695 cw(c35.074,61.308) v2@34.641,60.875 ; v2@37.001,48.63 ccw(c37.001,49.243) 37.435,48.81 ccw(c37.868,48.376) v2@37.255,48.376
DS: U1.2 U3.14 | length 29.2
  Top Layer w0.254: v2(18.459,41.645) v2@18.586,41.645
  Top Layer w0.381: v2@18.459,41.454 cw(c18.459,40.995) 18.784,41.32 cw(c19.109,41.645) v2@18.649,41.645 ; v2(18.459,41.645) 19.513,40.591 U1.2@21.831,40.591 ; 19.901,40.591 U1.2@21.294,40.591
  Top Layer w0.508: U3.14@10.122,54.396 v2(9.36,54.396) U3.14@10.833,54.396
  Bottom Layer w0.254: v2@9.18,54.216 cw(c8.746,53.783) 9.36,53.783 cw(c9.973,53.783) v2@9.539,54.216 ; v2(9.36,54.396) 9.36,50.617 12.094,47.883 14.406,47.883 16.097,46.192 18.001,46.192 18.459,45.734 v2(18.459,41.645) ; v2@18.279,41.825 ccw(c17.846,42.258) 18.459,42.258 ccw(c19.072,42.258) v2@18.639,41.825
GND: C3.1 C4.1 C5.1 C7.1 C8.1 C11.2 C12.1 C13.2 C14.2 C15.2 C16.1 D2.A D7.1 DL1.K DL2.K J2.1 J3.1 J4.1 J4.4 J5.1 J6.1 J7.6 R30.2@52.368,53.551 S1.1 S2.1 S3.1 S4.1 U1.3 U1.5 U1.21 U3.8 U3.13 | length 708.2
  Top Layer w0.254: U3.13@10.757,55.742 U3.13@10.833,55.666 ; v2@12.636,67.248 v2@12.871,67.013 ; 29.508,39.105 29.622,38.991 ; 36.713,30.215 37.094,30.215 ; DL1.K@38.188,65.147 39.363,66.232 ; DL1.K@38.377,64.972 39.363,66.232 ; DL1.K@38.603,64.775 38.603,65.472 39.363,66.232 ; DL1.K@38.703,64.775 39.363,66.232 ; DL1.K@39.066,64.66 39.363,66.232 ; DL1.K@39.322,64.633 39.363,66.232 ; C15.2@46.418,68.823 C15.2@47.701,68.823 ; C15.2@47.438,68.846 v1@47.701,70.091 ; C15.2@47.438,68.848 v1(47.701,69.987) ; 47.701,70.506 C15.2@47.701,68.823 ; 47.796,58.282 47.796,57.647 D2.A@47.669,57.52 ; C15.2@48.171,68.917 v1(47.701,69.987) ; C15.2@48.173,68.909 v1@47.701,70.091 ; 45.072,57.52 D2.A@47.669,57.52 ; 45.072,57.52 D2.A@47.669,57.52 ; 45.072,57.52 45.998,56.849 45.072,57.52 ; 45.072,57.52 45.827,58.379 45.072,57.52 ; 45.072,57.52 46.128,57.081 45.072,57.52 ; 45.072,57.52 46.005,58.181 45.072,57.52 ; 45.072,57.52 46.2,57.33 45.072,57.52 ; 45.072,57.52 46.13,57.955 45.072,57.52 ; 45.072,57.52 46.208,57.647 45.072,57.52 ; C15.2@47.701,68.823 v1(47.701,69.987) ; v1(47.701,69.987) C15.2@47.81,68.823 v1@47.701,70.091
  Top Layer w0.381: 8.553,57.444 8.553,56.25 9.137,55.666 ; U3.13@10.122,55.666 9.137,55.666 ; U3.13@10.833,55.666 9.137,55.666 ; 15.919,41.518 17.316,41.518 ; 15.982,41.518 17.316,41.518 ; 16.057,41.08 17.316,41.518 ; 16.057,41.956 17.316,41.518
  Top Layer w0.508: 8.793,30.408 9.614,29.351 ; 9.124,30.596 9.614,29.351 ; 9.495,30.683 9.614,29.351 ; 12.492,64.288 12.89,66.41 ; v2(12.89,67.248) 12.89,64.27 12.871,64.251 12.89,66.41 ; 13.251,64.281 12.89,66.41 ; 15.919,41.518 16.046,41.391 ; 15.919,44.439 v1(17.316,44.439) ; 15.982,44.439 v1(17.316,44.439) ; 16.037,44.062 v1(17.316,44.439) ; 16.037,44.816 v1(17.316,44.439) ; v1@16.052,60.936 16.243,60.746 ; U3.8@16.98,60.746 16.243,60.746 ; 17.316,41.518 19.043,39.791 U1.3@21.831,39.791 22.98,39.791 ; U3.8@17.691,60.746 16.243,60.746 ; 18.022,47.707 18.402,45.582 18.782,47.707 ; 18.402,47.741 18.402,45.525 v1(17.316,44.439) ; 19.419,30.617 19.799,32.743 20.179,30.617 ; 19.424,30.515 19.799,29.523 ; 19.52,39.791 U1.3@21.294,39.791 ; v1(19.799,33.746) 19.799,30.584 19.799,29.523 ; 20.174,30.515 19.799,29.523 ; U1.5@21.831,38.191 23.031,38.191 ; U1.5@22.368,38.191 23.031,38.191 ; U1.3@22.368,39.791 22.98,39.791 ; 29.508,39.105 23.412,39.105 ; U1.21@30.311,38.991 29.622,38.991 U1.21@30.848,38.991 ; 37.094,30.215 39.541,30.215 40.176,30.85 v1(40.176,36.057) 40.176,63.202 ; 37.158,30.215 39.317,30.215 ; 37.191,29.835 39.317,30.215 ; 37.191,30.594 39.317,30.215 ; 41.522,51.551 cw(c42.437,51.526) 42.462,52.44 ; 9.061,29.904 9.614,29.351 ; 9.061,29.904 9.061,30.596 ; 9.061,29.904 9.427,30.491 9.061,29.904 ; 9.061,29.904 8.695,30.491 9.061,29.904 ; 9.061,29.904 9.061,30.596 ; 9.061,29.904 9.061,30.596 ; 9.614,29.351 19.627,29.351 19.799,29.523 ; 22.98,39.791 23.412,39.359 23.412,39.105 ; 23.031,38.191 23.412,38.572 23.412,39.105 ; 40.176,63.202 38.603,64.775 40.176,63.202 ; 40.176,63.202 39.112,65.076 40.176,63.202 ; 40.176,63.202 38.376,64.386 40.176,63.202 ; 40.176,63.202 DL1.K@38.703,64.775 40.176,63.202
  Top Layer w0.635: J7.6@4.563,57.828 7.252,59.14 ; J7.6@5.066,57.097 7.252,59.14 ; D7.1@10.551,74.107 11.22,75.681 ; D7.1@11.115,73.297 9.002,73.971 ; D7.1@11.115,74.645 9.002,73.971 ; D7.1@11.889,74.107 11.22,75.681 ; J3.1@13.697,81.902 14.084,79.262 ; J3.1@14.084,82.666 14.084,76.835 13.311,76.062 11.601,76.062 11.22,75.681 ; J3.1@14.141,81.929 14.084,79.262 ; J3.1@14.583,81.883 14.084,79.262 ; 37.066,30.976 37.001,33.517 ; J7.6@4.788,57.444 5.556,57.444 ; J7.6@4.788,57.444 7.252,59.14 ; J7.6@4.788,57.444 5.556,57.444 ; 5.556,57.444 8.045,59.933 8.045,73.014 9.002,73.971 ; 5.556,57.444 4.916,57.869 5.556,57.444 ; 5.556,57.444 4.916,57.018 5.556,57.444 ; 9.002,73.971 D7.1@11.22,73.971 ; 9.002,73.971 D7.1@11.22,73.971 ; D7.1@11.22,73.971 11.22,75.681 ; 37.001,33.517 37.001,30.308 37.094,30.215 37.001,32.76 37.001,33.517
  Top Layer w1.27: 15.919,41.518 15.919,44.439
  Bottom Layer w0.254: v2@12.636,67.248 v2@12.871,67.483 ; S4.1@14.776,35.854 S4.1@14.776,36.057 ; S3.1@25.217,36.406 25.825,37.738 ; S3.1@25.217,42.744 25.825,41.412 ; S3.1@25.459,36.321 25.825,37.738 ; S3.1@25.459,42.829 25.825,41.412 ; S3.1@25.775,36.275 25.825,37.738 ; S3.1@25.775,42.875 25.825,41.412 ; S3.1@25.825,36.125 25.825,35.803 S3.1@25.825,43.057 ; S3.1@26.093,36.299 25.825,37.738 ; S3.1@26.093,42.851 25.825,41.412 ; S3.1@26.34,36.368 25.825,37.738 ; S3.1@26.34,42.782 25.825,41.412 ; 28.619,85.841 28.689,85.771 28.689,85.587 ; 31.303,85.587 31.303,85.731 31.413,85.841 ; S2.1@36.747,36.057 S2.1@36.747,36.075 ; S2.1@36.747,43.057 36.775,43.057 39.977,43.057 41.359,44.439 46.414,44.439 47.796,43.057 S1.1@47.796,36.057 ; S2.1@36.775,43.075 38.237,43.057 ; S2.1@36.806,42.757 38.237,43.057 ; S2.1@36.814,43.392 38.237,43.057 ; S2.1@36.88,42.512 38.237,43.057 ; S2.1@36.894,43.635 38.237,43.057 ; 45.129,65.648 46.018,64.759 47.542,64.759 47.669,64.886 ; S1.1@47.215,36.395 47.796,37.737 ; S1.1@47.215,42.755 47.796,41.413 ; S1.1@47.334,42.909 46.537,44.316 ; S1.1@47.458,36.314 47.796,37.737 ; S1.1@47.458,42.836 47.796,41.413 ; S1.1@47.547,43.052 46.537,44.316 ; S1.1@47.775,36.275 47.796,37.737 ; S1.1@47.775,42.875 47.796,41.413 ; S1.1@47.775,43.275 46.537,44.316 ; S1.1@47.955,43.538 46.537,44.316 ; S1.1@48.06,43.772 46.537,44.316 ; S1.1@48.093,36.305 47.796,37.737 ; S1.1@48.093,42.845 47.796,41.413 ; S1.1@48.338,36.379 47.796,37.737 ; S1.1@48.338,42.771 47.796,41.413 ; 52.097,52.328 50.783,53.456 ; 52.249,52.533 50.783,53.456 ; 52.276,52.131 53.384,52.186 ; 52.294,52.388 53.384,52.186 ; 52.368,52.63 53.384,52.186 ; 52.453,52.997 50.783,53.456 ; 52.496,52.85 53.384,52.186 ; R30.2@52.502,53.247 50.783,53.456 ; 52.673,53.037 53.384,52.186 ; J6.1@53.987,81.784 54.597,80.4 ; J6.1@54.231,81.867 54.597,80.4 ; J6.1@54.597,81.912 54.597,80.4 ; J6.1@54.597,82.412 54.597,76.894 50.971,73.268 50.463,73.268 47.669,70.474 47.669,64.886 ; J6.1@54.963,81.867 54.597,80.4 ; J6.1@55.207,81.784 54.597,80.4 ; 47.669,64.886 47.669,58.409 47.796,58.282 47.796,55.996 50.336,53.456 R30.2@52.114,53.456 ; 50.783,53.456 52.368,52.757 ; R30.2@52.114,53.456 53.384,52.186 ; R30.2@52.114,53.456 51.86,52.757 R30.2@52.114,53.456 ; R30.2@52.114,53.456 52.757,53.084 R30.2@52.114,53.456 ; R30.2@52.114,53.456 52.118,52.713 R30.2@52.114,53.456 ; R30.2@52.114,53.456 52.588,52.884 R30.2@52.114,53.456 ; R30.2@52.114,53.456 52.368,52.757 ; R30.2@52.114,53.456 52.368,52.757 ; 53.315,52.255 ccw(c53.459,52.399) 53.509,52.202 cw(c53.459,52.399) 53.315,52.255
  Bottom Layer w0.508: J7.6@4.285,57.369 4.87,55.154 ; J7.6@4.844,56.939 7.074,57.444 J7.6@4.844,57.949 ; J7.6@5.294,57.406 4.87,55.154 ; J2.1@5.578,81.873 6.083,79.643 ; J2.1@6.083,81.929 6.083,79.643 ; J2.1@6.083,82.666 6.083,75.992 12.89,69.185 v2(12.89,67.248) ; J2.1@6.588,81.873 6.083,79.643 ; S4.1@14.331,36.32 14.776,38.499 ; S4.1@14.331,42.83 14.776,40.651 ; S4.1@14.775,36.275 14.776,38.499 ; S4.1@14.775,42.875 14.776,40.651 ; S4.1@14.776,36.057 S4.1@14.776,42.661 ; S4.1@15.219,36.319 14.776,38.499 ; S4.1@15.219,42.83 14.776,40.651 ; v2@15.848,42.751 ccw(c15.065,43.534) 16.173,43.534 ; v2@16.046,42.788 16.173,42.915 16.173,44.312 15.182,45.303 11.753,45.303 10.407,46.649 6.661,46.649 4.87,48.44 4.87,57.361 J7.6@4.788,57.444 ; v1@16.052,60.936 15.938,61.051 12.592,61.051 8.985,57.444 8.553,57.444 J7.6@4.788,57.444 ; 16.3,39.105 19.799,35.606 v1(19.799,33.746) 25.292,33.746 25.825,34.279 ; S3.1@25.332,42.82 25.825,40.65 ; S3.1@25.336,35.799 25.825,34.279 ; S3.1@25.775,35.875 25.825,34.279 ; S3.1@25.775,36.075 25.825,36.125 25.825,43.025 S3.1@25.775,43.075 ; S3.1@25.775,42.875 25.825,40.65 ; S3.1@25.825,35.803 25.825,34.279 ; S3.1@26.218,35.827 25.825,34.279 ; S3.1@26.22,42.84 25.825,40.65 ; J4.1@28.196,81.858 28.689,79.638 ; J4.1@28.689,81.912 28.689,79.638 ; J4.1@28.689,82.412 28.689,77.389 31.303,74.775 DL2.K@31.303,64.775 ; J4.1@29.182,81.858 28.689,79.638 ; DL2.K@30.798,64.831 31.303,67.061 DL2.K@31.808,64.831 ; S2.1@36.331,36.32 36.775,38.499 ; S2.1@36.331,42.83 36.775,40.651 ; S2.1@36.747,36.057 v1(40.176,36.057) ; S2.1@36.775,36.275 36.775,38.499 ; S2.1@36.775,42.875 36.775,40.651 ; S2.1@36.775,43.075 36.775,43.057 S2.1@36.775,36.075 38.999,36.057 ; S2.1@36.816,35.631 38.999,36.057 ; S2.1@36.823,36.518 38.999,36.057 ; S2.1@37.219,36.32 36.775,38.499 ; S2.1@37.219,42.83 36.775,40.651 ; DL1.K@38.195,64.763 38.393,67.173 ; DL1.K@38.271,65.107 DL1.K@38.603,64.775 ; DL1.K@38.393,65.229 38.393,74.279 41.643,77.529 J5.1@41.643,82.412 ; DL1.K@38.703,64.775 38.393,67.173 ; DL1.K@39.197,64.893 38.393,67.173 ; J5.1@41.15,81.858 41.643,79.638 ; J5.1@41.643,81.912 41.643,79.638 ; J5.1@42.136,81.858 41.643,79.638 ; J7.6@4.788,57.444 4.87,55.154
  Bottom Layer w1.27: J2.1@6.083,82.666 6.083,85.022 ; J2.1@6.083,82.945 6.083,85.022 ; J3.1@14.084,82.666 14.084,85.784 ; J3.1@14.141,82.945 14.084,85.784 ; S4.1@14.775,42.875 v2(15.938,42.661) S4.1@15.172,42.661 ; J4.1@28.689,82.412 28.689,85.587 J4.1@28.689,82.912 ; J5.1@41.643,82.412 41.643,85.657 ; J5.1@41.643,82.912 41.643,85.657 ; J6.1@54.597,82.412 54.597,85.276 ; J6.1@54.597,82.912 54.597,85.276 ; 6.083,85.022 6.902,85.841 14.141,85.841 ; 14.084,85.784 14.141,85.841 ; 14.141,85.841 28.619,85.841 31.413,85.841 41.827,85.841 ; 41.643,85.657 41.827,85.841 ; 41.827,85.841 54.032,85.841 54.597,85.276
  other v1: 17.291,42.915 5.861,52.669 56.432,53.583 5.911,54.243 45.256,56.123 47.796,56.123 56.432,56.123 6.902,56.25 8.045,57.139 6.902,57.266 6.902,58.282 56.432,58.663 45.256,59.171 46.526,59.171 47.796,59.171 56.432,61.203 15.919,61.33 56.432,63.743 9.442,65.648 56.432,66.283 16.681,67.172 46.526,67.68 47.669,67.68 48.812,67.68 56.432,69.204 46.526,69.966 48.812,69.966 5.505,71.617 56.432,72.125 22.802,72.76 17.951,73.141 1.822,74.919 56.432,75.046 19.475,75.3 8.68,75.427 14.014,75.808 51.657,75.833 52.851,77.23 10.204,77.713 12.998,77.967 15.03,77.967 53.968,78.653 30.397,79.364 32.048,79.364 33.699,79.364 7.537,84.825 1.568,84.952 9.188,86.349 1.568,86.603 56.813,86.73
GND1: C1.2 C2.2 C6.2 J1.1 Q4.3 Q5.3 Q6.3 R2.1 R30.1@52.368,51.551 R31.1 R32.1 R33.1 TVS1.1 U2.3 U2.5 | length 217.3
  Top Layer w0.254: 3.6,23.992 5.378,22.214 ; 12.49,21.579 11.855,22.214 ; 16.935,21.325 16.935,21.877 ; 34.461,24.373 34.461,24.811 ; 42.305,21.168 42.462,21.325 ; 48.925,20.944 48.925,22.849 ; 5.378,22.214 11.855,22.214 ; 5.378,22.214 7.664,22.214 11.855,22.214
  Top Layer w0.508: 16.383,21.325 16.935,21.877 ; 24.937,24.212 25.317,22.087 ; 25.317,24.246 25.317,22.087 ; 25.317,24.373 25.317,21.452 25.444,21.325 ; 25.697,24.212 25.317,22.087 ; 34.08,21.325 34.461,21.706 34.461,24.373 ; 34.081,24.212 34.461,22.087 ; 34.461,24.246 34.461,22.087 ; 34.841,24.212 34.461,22.087 ; 16.935,21.877 16.935,24.373 16.935,21.877 ; 16.935,22.207 17.377,24.328 16.935,22.207 ; 16.935,22.207 16.618,24.351 16.935,22.207 ; 16.935,22.207 16.998,24.373 16.935,22.207
  Top Layer w1.27: TVS1.1@41.7,9.455 44.689,9.455 TVS1.1@41.954,9.455
  Top Layer w2.54: Q6.3@13.984,18.926 16.383,21.325 Q6.3@14.484,18.926 ; 16.935,21.325 25.444,21.325 28.111,21.325 ; Q4.3@42.305,18.926 42.305,21.168 ; J1.1@46.192,7.355 J1.1@46.399,7.562 ; 46.399,16.488 J1.1@46.192,7.605 ; 28.111,21.325 28.111,18.956 Q5.3@28.081,18.926 28.111,21.325 ; 28.111,21.325 34.08,21.325 42.462,21.325 45.764,21.325 46.399,20.69 ; J1.1@46.192,7.605 v1@46.399,11.165 ; J1.1@46.192,7.605 v1@46.399,9.768 ; J1.1@46.192,7.605 v1@46.399,9.768 ; J1.1@46.399,7.562 46.399,20.69 ; J1.1@46.399,7.562 v1@46.399,9.768 ; v1@46.399,9.768 v1@46.399,11.165 ; v1@46.399,11.165 46.399,12.435 46.399,13.705 46.399,19.039 46.399,20.69
  Bottom Layer w0.254: v1@46.192,9.617 45.114,7.918 v1@46.192,9.617 ; v1@46.192,9.617 47.27,7.918 v1@46.192,9.617 ; v1@46.192,9.617 45.343,7.793 v1@46.192,9.617 ; v1@46.192,9.617 47.04,7.793 v1@46.192,9.617 ; v1@46.192,9.617 45.584,7.699 v1@46.192,9.617 ; v1@46.192,9.617 46.8,7.699 v1@46.192,9.617 ; v1@46.192,9.617 45.832,7.637 v1@46.192,9.617 ; v1@46.192,9.617 46.552,7.637 v1@46.192,9.617 ; v1@46.192,9.617 46.192,7.605 v1@46.192,9.617 ; v1@46.192,10.911 J1.1@46.192,7.355 46.192,9.768 v1@46.192,10.911 ; v1@46.192,10.911 v1@48.939,10.911 ; v1@46.192,10.911 47.288,10.911 48.558,10.911 v1@48.939,10.911 ; v1@48.939,10.911 55.543,17.515 51.352,13.324 50.717,12.689 50.082,12.054 49.447,11.419 v1@48.939,10.911
  other v1: 45.002,9.768 46.145,9.768 47.415,9.768 46.145,11.165 47.288,11.165 48.558,11.165 49.701,11.165 50.971,11.165 1.314,12.181 46.018,12.435 47.288,12.435 48.558,12.435 49.701,12.435 50.971,12.435 46.018,13.705 47.288,13.705 48.558,13.705 49.701,13.705 50.971,13.705 1.695,16.499 3.981,20.817 7.664,21.706 43.224,23.611 44.494,23.611 45.764,23.611 56.432,23.611 2.076,23.865 5.886,24.246 55.416,24.627 3.981,25.008 43.224,26.151 44.494,26.151 45.764,26.151 54.908,26.151 56.432,26.151 7.537,26.532 2.076,27.04 53.384,27.675 55.416,27.675 5.124,28.183 52.368,29.199 54.4,29.199 56.432,29.199 2.203,30.215 50.844,30.723 53.384,30.723 55.416,30.723 4.743,31.231 56.432,32.247 1.441,34.025 56.432,35.295 1.314,37.073 56.432,38.343 1.695,40.121 49.574,41.137 50.59,41.137 49.574,42.153 50.59,42.153 51.606,42.153 49.574,43.169 48.812,45.709 52.622,45.963 53.638,45.963 54.654,45.963 49.066,50.027
IIC_SCL: J5.2 R9.1 U1.28 | length 80.2
  Top Layer w0.381: U1.28@26.709,43.069 26.733,43.093 26.733,44.204 ; U1.28@26.709,43.606 26.733,44.204 ; v2@26.96,45.828 cw(c26.635,45.503) 27.095,45.503 cw(c27.555,45.503) v2@27.23,45.828 ; v2(27.095,45.963) 27.095,44.566 26.733,44.204
  Top Layer w0.635: 32.556,74.411 37.325,74.411 39.103,76.189 J5.2@39.103,82.412 ; 32.619,74.411 35.159,74.411
  Bottom Layer w0.254: v2(27.095,45.963) 27.222,45.836 37.255,45.836 41.827,50.408 41.827,59.592 37.295,64.124 37.255,64.124 37.255,74.928 39.103,76.776 J5.2@39.103,82.412 ; v2@27.275,46.143 ccw(c28.015,46.883) 28.015,45.836 ; J5.2@38.493,81.784 39.103,80.4 ; J5.2@38.737,81.867 39.103,80.4 ; J5.2@39.103,81.912 39.103,80.4 ; J5.2@39.469,81.867 39.103,80.4 ; J5.2@39.713,81.784 39.103,80.4
IIC_SDA: J5.3 R10.1 U1.27 | length 72.9
  Top Layer w0.381: U1.27@27.509,43.069 27.509,44.058 ; U1.27@27.509,43.606 27.509,44.058 ; v2@28.738,46.463 cw(c28.413,46.138) 28.873,46.138 cw(c29.333,46.138) v2@29.008,46.463 ; v2(28.873,46.598) 28.873,45.422 27.509,44.058
  Top Layer w0.635: 32.556,76.951 35.547,76.951 36.563,77.967 J5.3@36.563,82.412 ; 32.619,76.951 35.159,76.951
  Bottom Layer w0.254: v2(28.873,46.598) 36.874,46.598 41.319,51.043 41.319,59.381 37.084,63.616 37.045,63.616 36.563,64.098 J5.3@36.563,82.412 ; v2@29.053,46.418 cw(c29.486,45.985) 29.486,46.598 cw(c29.486,47.211) v2@29.053,46.778 ; J5.3@35.953,81.784 36.563,80.4 ; J5.3@36.197,81.867 36.563,80.4 ; J5.3@36.563,81.912 36.563,80.4 ; J5.3@36.929,81.867 36.563,80.4 ; J5.3@37.173,81.784 36.563,80.4
KEY1: S1.2 U1.12 | length 86.6
  Top Layer w0.254: v2@25.958,31.472 26.022,31.409 v2@25.958,31.472
  Top Layer w0.381: v2@25.76,31.543 ccw(c25.451,31.853) 25.888,31.853 ; 25.888,31.884 ccw(c26.371,31.884) v2@26.03,31.543 ; U1.12@25.92,34.101 25.888,34.069 v2@25.888,31.542 ; v2@25.888,31.542 25.958,31.472 v2@25.888,31.542
  Bottom Layer w0.254: v2@26.022,31.409 27.146,31.409 27.476,31.739 27.476,32.628 28.98,34.132 31.643,34.132 31.665,34.11 41.299,34.11 ; v2@26.075,31.229 cw(c26.508,30.796) 26.508,31.409 cw(c26.508,32.022) v2@26.075,31.588 ; 41.299,34.11 S1.2@43.246,36.057 ; 41.299,34.11 43.244,36.055 S1.2@43.246,36.057 ; 41.998,34.809 43.519,35.383 41.998,34.809 ; 41.998,34.809 42.779,36.234 41.998,34.809 ; 41.998,34.809 43.41,35.615 41.998,34.809 ; 41.998,34.809 42.993,36.094 41.998,34.809 ; 41.998,34.809 43.225,35.875 41.998,34.809 ; S1.2@43.246,36.057 43.246,43.057 43.246,36.075 S1.2@43.246,36.057 ; 43.246,37.737 42.665,36.395 43.246,37.737 ; 43.246,37.737 43.788,36.379 43.246,37.737 ; 43.246,37.737 42.908,36.314 43.246,37.737 ; 43.246,37.737 43.543,36.305 43.246,37.737 ; 43.246,37.737 43.225,36.275 43.246,37.737 ; 43.246,41.413 43.788,42.771 43.246,41.413 ; 43.246,41.413 42.665,42.755 43.246,41.413 ; 43.246,41.413 43.543,42.845 43.246,41.413 ; 43.246,41.413 42.908,42.836 43.246,41.413 ; 43.246,41.413 43.225,42.875 43.246,41.413
  other v2: 25.895,31.409
KEY2: S2.2 U1.13 | length 40.6
  Top Layer w0.254: U1.13@26.682,34.063 U1.13@26.72,34.101 ; v2(26.714,32.374) v2@26.72,32.38
  Top Layer w0.381: U1.13@26.72,33.564 26.72,32.38 U1.13@26.72,34.101 ; v2@26.579,32.509 ccw(c26.239,32.849) 26.72,32.849 cw(c26.239,32.849) v2@26.579,32.509 ; 26.72,32.818 ccw(c27.158,32.818) 26.849,32.509 cw(c27.158,32.818) 26.72,32.818
  Bottom Layer w0.254: v2@26.534,32.554 ccw(c26.177,32.911) 26.682,32.911 ; 26.682,33.063 ccw(c27.403,33.063) v2@26.894,32.554 ; v2@26.714,32.628 26.682,32.66 26.682,33.231 29.313,35.862 32.002,35.862 S2.2@32.197,36.057 ; S2.2@32.037,36.616 30.736,35.862 ; S2.2@32.147,36.384 30.736,35.862 ; S2.2@32.196,35.503 30.736,35.862 ; S2.2@32.225,36.075 30.736,35.862 ; S2.2@32.236,35.756 30.736,35.862 ; S2.2@32.197,36.057 32.197,36.075 S2.2@32.197,36.057
  Bottom Layer w0.508: S2.2@31.781,36.32 32.225,38.499 ; S2.2@31.781,42.83 32.225,40.651 ; S2.2@32.225,36.075 S2.2@32.225,43.075 ; S2.2@32.225,36.275 32.225,38.499 ; S2.2@32.225,42.875 32.225,40.651 ; S2.2@32.669,36.32 32.225,38.499 ; S2.2@32.669,42.83 32.225,40.651
KEY3: S3.2 U1.14 | length 69
  Top Layer w0.381: v2@23.787,36.946 26.333,36.946 27.52,35.759 ; v2@23.845,37.157 ccw(c24.354,37.666) 24.354,36.946 ; U1.14@27.52,34.101 27.52,35.759 ; U1.14@27.52,34.639 27.52,35.759
  Bottom Layer w0.254: S3.2@20.667,36.406 21.275,37.738 ; S3.2@20.667,42.744 21.275,41.412 ; S3.2@20.909,36.321 21.275,37.738 ; S3.2@20.909,42.829 21.275,41.412 ; S3.2@21.081,36.83 22.963,37.022 ; S3.2@21.124,36.578 22.963,37.022 ; S3.2@21.225,42.875 21.275,41.412 ; S3.2@21.275,43.057 21.275,37.022 ; S3.2@21.375,35.994 22.963,37.022 ; S3.2@21.528,35.789 22.963,37.022 ; S3.2@21.543,36.299 21.275,37.738 ; S3.2@21.543,42.851 21.275,41.412 ; S3.2@21.79,36.368 21.275,37.738 ; S3.2@21.79,42.782 21.275,41.412 ; v2@23.531,36.843 ccw(c23.097,36.409) 23.097,37.022 ccw(c23.097,37.635) v2@23.531,37.202 ; v2(23.711,37.022) 21.275,37.022 ; S3.2@21.225,36.275 21.275,37.738 ; S3.2@21.225,36.275 21.275,37.022 ; S3.2@21.225,36.275 22.963,37.022 ; S3.2@21.225,36.275 21.275,37.022 ; 21.275,37.022 20.711,36.529 21.275,37.022 ; 21.275,37.022 21.768,36.458 21.275,37.022 ; 21.275,37.022 20.919,36.364 21.275,37.022 ; 21.275,37.022 21.541,36.322 21.275,37.022 ; S3.2@21.275,36.057 21.275,36.075 S3.2@21.275,36.057
  Bottom Layer w0.508: S3.2@20.781,36.32 21.225,38.499 ; S3.2@20.781,42.83 21.225,40.651 ; S3.2@21.225,36.075 S3.2@21.225,43.075 ; S3.2@21.225,36.275 21.225,38.499 ; S3.2@21.225,42.875 21.225,40.651 ; S3.2@21.669,36.32 21.225,38.499 ; S3.2@21.669,42.83 21.225,40.651
KEY4: S4.2 U1.32 | length 86.1
  Top Layer w0.254: v2(4.794,43.753) 5.962,43.753 6.521,44.312 6.546,44.312 v2(6.546,48.224) ; v2@4.973,43.574 cw(c5.407,43.14) 5.407,43.753 cw(c5.407,44.366) v2@4.973,43.933 ; v2@6.367,48.044 cw(c5.933,47.61) 6.546,47.61 cw(c7.16,47.61) v2@6.726,48.044 ; v2(14.37,60.162) v2@14.395,60.136
  Top Layer w0.508: v2(14.37,60.162) 14.37,54.015 v2(14.395,53.989) ; v2@23.158,45.328 23.509,44.977 ; v2@23.285,45.404 ccw(c23.776,45.404) 23.429,45.057 ; U1.32@23.509,43.069 23.509,44.977 ; U1.32@23.509,43.606 23.509,44.977 ; v2@23.068,45.314 cw(c22.005,44.251) 23.509,44.251 ccw(c22.005,44.251) v2@23.068,45.314 ; v2@23.14,45.279 cw(c23.077,44.852) 23.509,44.852 ccw(c23.077,44.852) v2@23.14,45.279
  Bottom Layer w0.254: v2@6.367,48.403 ccw(c5.933,48.837) 6.546,48.837 ccw(c7.16,48.837) v2@6.726,48.403 ; v2(6.546,48.224) 6.546,50.535 6.953,50.941 6.953,53.785 13.329,60.162 v2(14.37,60.162) ; v2@14.19,59.982 ccw(c13.756,59.548) 13.756,60.162 ccw(c13.756,60.775) v2@14.19,60.341 ; v2@14.395,53.735 cw(c14.395,52.693) 15.132,53.43 ; v2@14.573,53.989 v2(23.158,45.404) ; v2@22.904,45.404 ccw(c22.291,45.404) 22.724,45.838 ccw(c23.158,46.271) v2@23.158,45.658
  Bottom Layer w0.508: v2(4.794,43.753) 7.08,43.753 7.758,43.075 S4.2@10.225,43.075 8.001,43.075 ; S4.2@9.781,36.32 10.225,38.499 ; S4.2@9.781,42.83 10.225,40.651 ; S4.2@10.18,42.631 8.001,43.075 ; S4.2@10.18,43.519 8.001,43.075 ; S4.2@10.225,36.075 S4.2@10.225,43.042 ; S4.2@10.225,36.275 10.225,38.499 ; S4.2@10.225,42.875 10.225,40.651 ; S4.2@10.669,36.32 10.225,38.499 ; S4.2@10.669,42.83 10.225,40.651
MISO: DL4.A J7.1 R26.1 U1.16 | length 113.9
  Top Layer w0.254: 19.348,69.204 19.348,69.712
  Top Layer w0.508: J7.1@1.841,62.829 0.978,61.254 ; J7.1@2.552,62.117 0.978,61.254 ; v2(5.632,42.48) 3.273,42.48 0.978,44.775 0.978,61.254 ; U1.16@29.12,33.564 v2@29.889,32.628 ; U1.16@29.12,34.101 29.12,33.397 v2@29.889,32.628 ; 29.493,33.024 cw(c28.842,32.374) v2@29.762,32.374 ; 29.572,33.014 cw(c28.91,32.47) v2@29.763,32.386 ; v2(29.889,32.374) v2@29.889,32.628 ; 0.978,61.254 J7.1@2.248,62.524 0.978,61.254
  Top Layer w0.635: 19.297,69.153 DL4.A@19.297,64.775 19.297,69.128 19.297,69.153 ; 19.297,69.153 19.348,69.204 19.31,69.166 19.297,69.153 ; 19.297,66.523 19.348,69.064 19.297,66.523
  Bottom Layer w0.254: J7.1@1.616,62.593 2.076,63.87 ; J7.1@1.867,62.529 2.076,63.87 ; J7.1@2.615,62.625 2.076,63.87 ; J7.1@2.841,62.749 2.076,63.87 ; v2(5.632,42.48) 6.829,42.48 9.061,40.248 9.061,32.374 12.084,29.351 29.483,29.351 30.016,29.885 30.016,32.247 v2(29.889,32.374) ; v2@5.812,42.3 cw(c6.245,41.867) 6.245,42.48 cw(c6.245,43.093) v2@5.812,42.66 ; DL4.A@19.297,64.775 17.833,63.311 8.166,63.311 7.302,64.175 2.381,64.175 2.076,63.87 ; v2@29.709,32.194 cw(c28.969,31.454) 30.016,31.454 ; 2.076,63.87 2.076,62.695 J7.1@2.248,62.524 2.076,63.87
MOSI: J7.4 U1.15 U3.11 | length 65.7
  Top Layer w0.254: v2@3.86,54.949 cw(c3.704,55.236) 3.473,55.005 ; v2(3.981,54.726) 3.752,54.726 3.473,55.005 ; J7.4@4.788,59.984 3.473,58.669 3.473,55.005
  Top Layer w0.508: v2(8.629,58.892) 9.315,58.206 ; U3.11@10.122,58.206 9.315,58.206 ; U3.11@10.833,58.206 9.315,58.206 ; v2@28.32,31.758 U1.15@28.32,34.101 ; v2@28.32,31.79 U1.15@28.32,33.564
  Bottom Layer w0.254: v2@3.801,54.546 cw(c3.368,54.113) 3.981,54.113 cw(c4.594,54.113) v2@4.161,54.546 ; v2(3.981,54.726) 3.981,46.75 5.403,45.328 10.153,45.328 12.439,43.042 12.439,33.415 15.208,30.647 26.387,30.647 26.615,30.875 28.238,30.875 28.34,30.977 v2(28.34,31.739) ; v2@28.16,31.559 cw(c27.726,31.126) 28.34,31.126 cw(c28.953,31.126) v2@28.519,31.559
  Bottom Layer w0.508: J7.4@4.788,59.984 7.537,59.984 v2(8.629,58.892)